# Altium PCB RT-701_V005.PcbDoc (part 1 of 2)
Units mm, origin at the board's own origin, x right, y up, seen from the top; angles counter-clockwise.
Board outline 41.11 x 25.65 mm, 4 copper layers (Top Layer, Signal Layer 1, Signal Layer 2, Bottom Layer), stack 0.777 mm thick; 76 components, 63 nets, 332 pads, 90 vias.
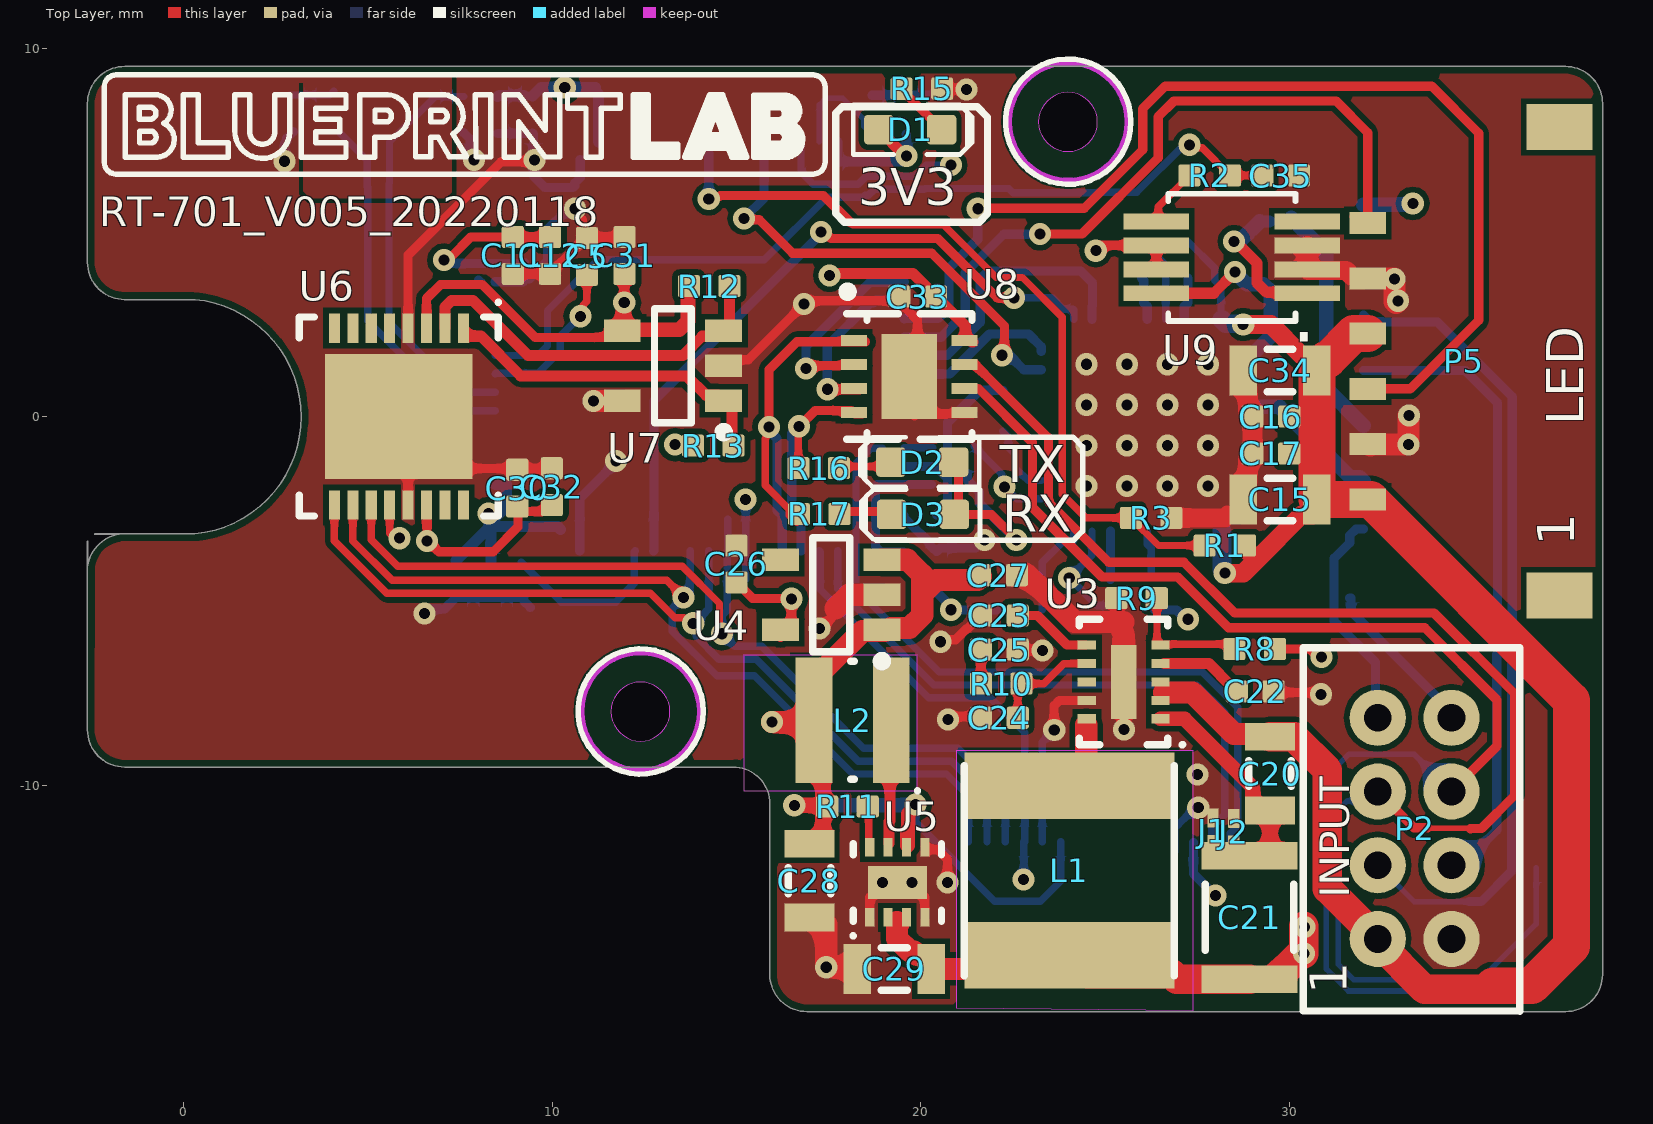
[diagram p0: Top Layer view]
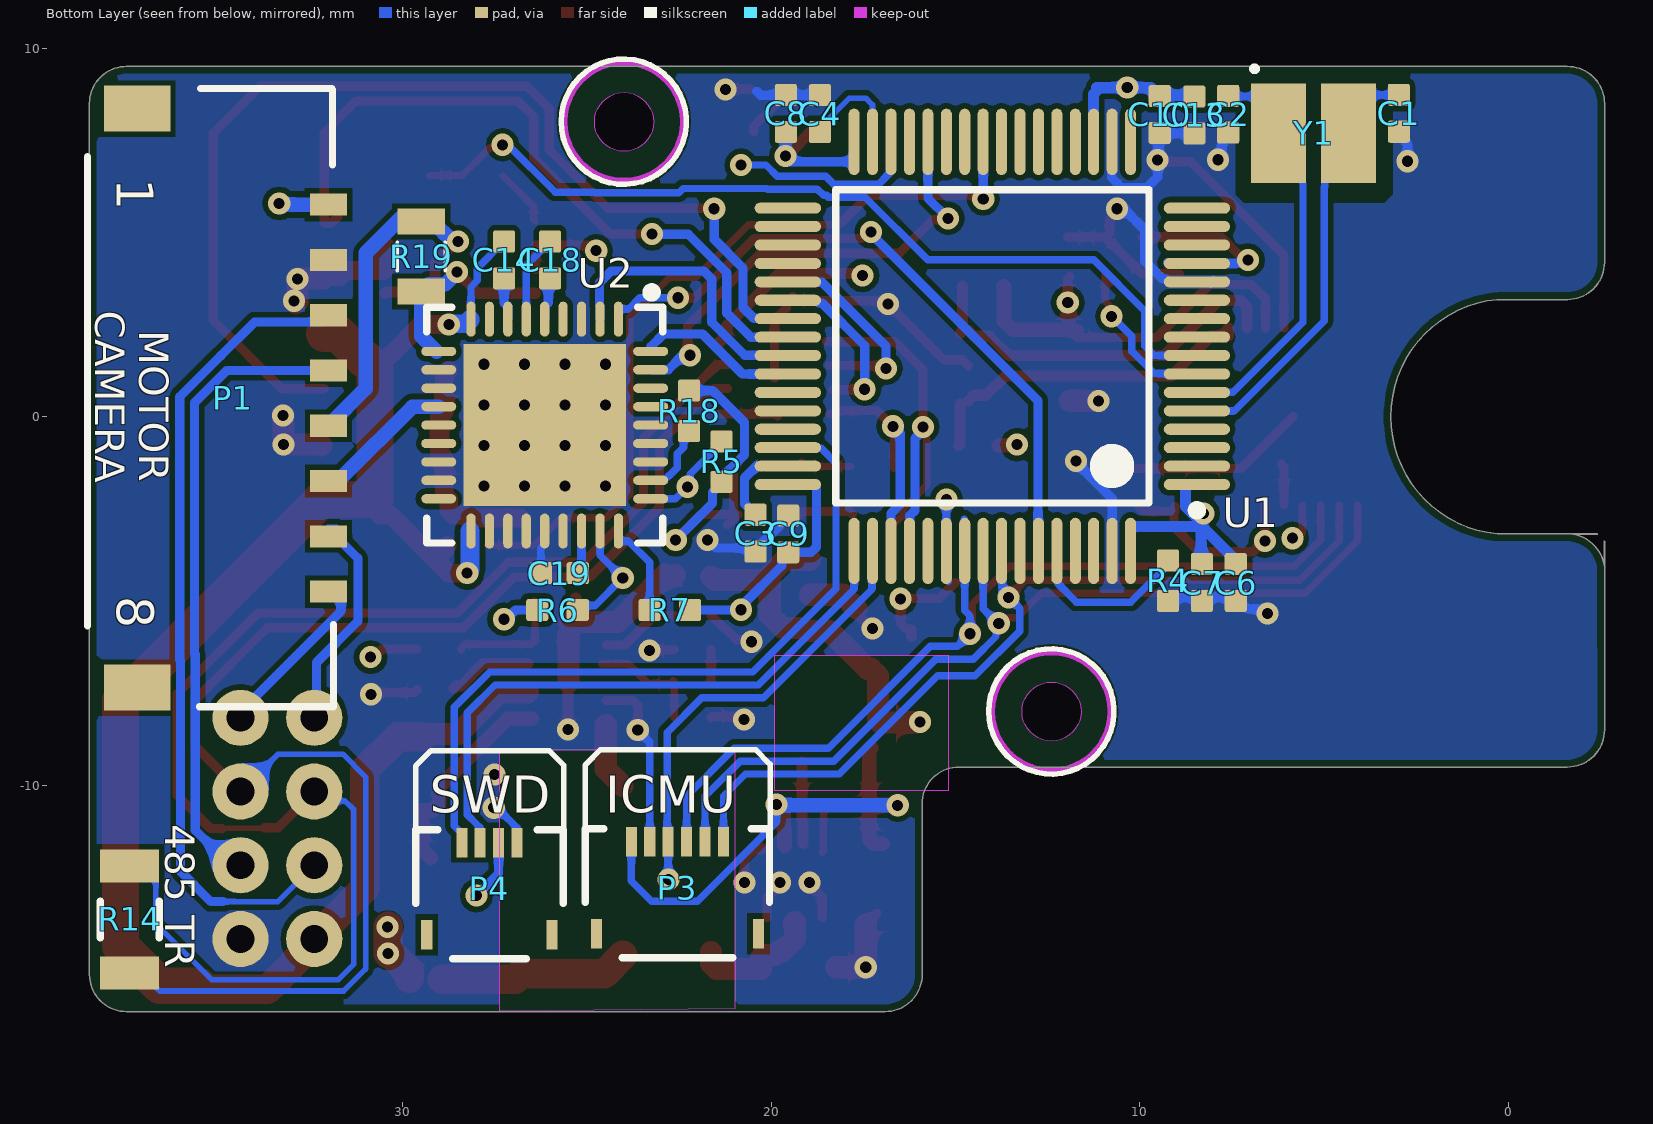
[diagram p1: Bottom Layer view, seen from below]
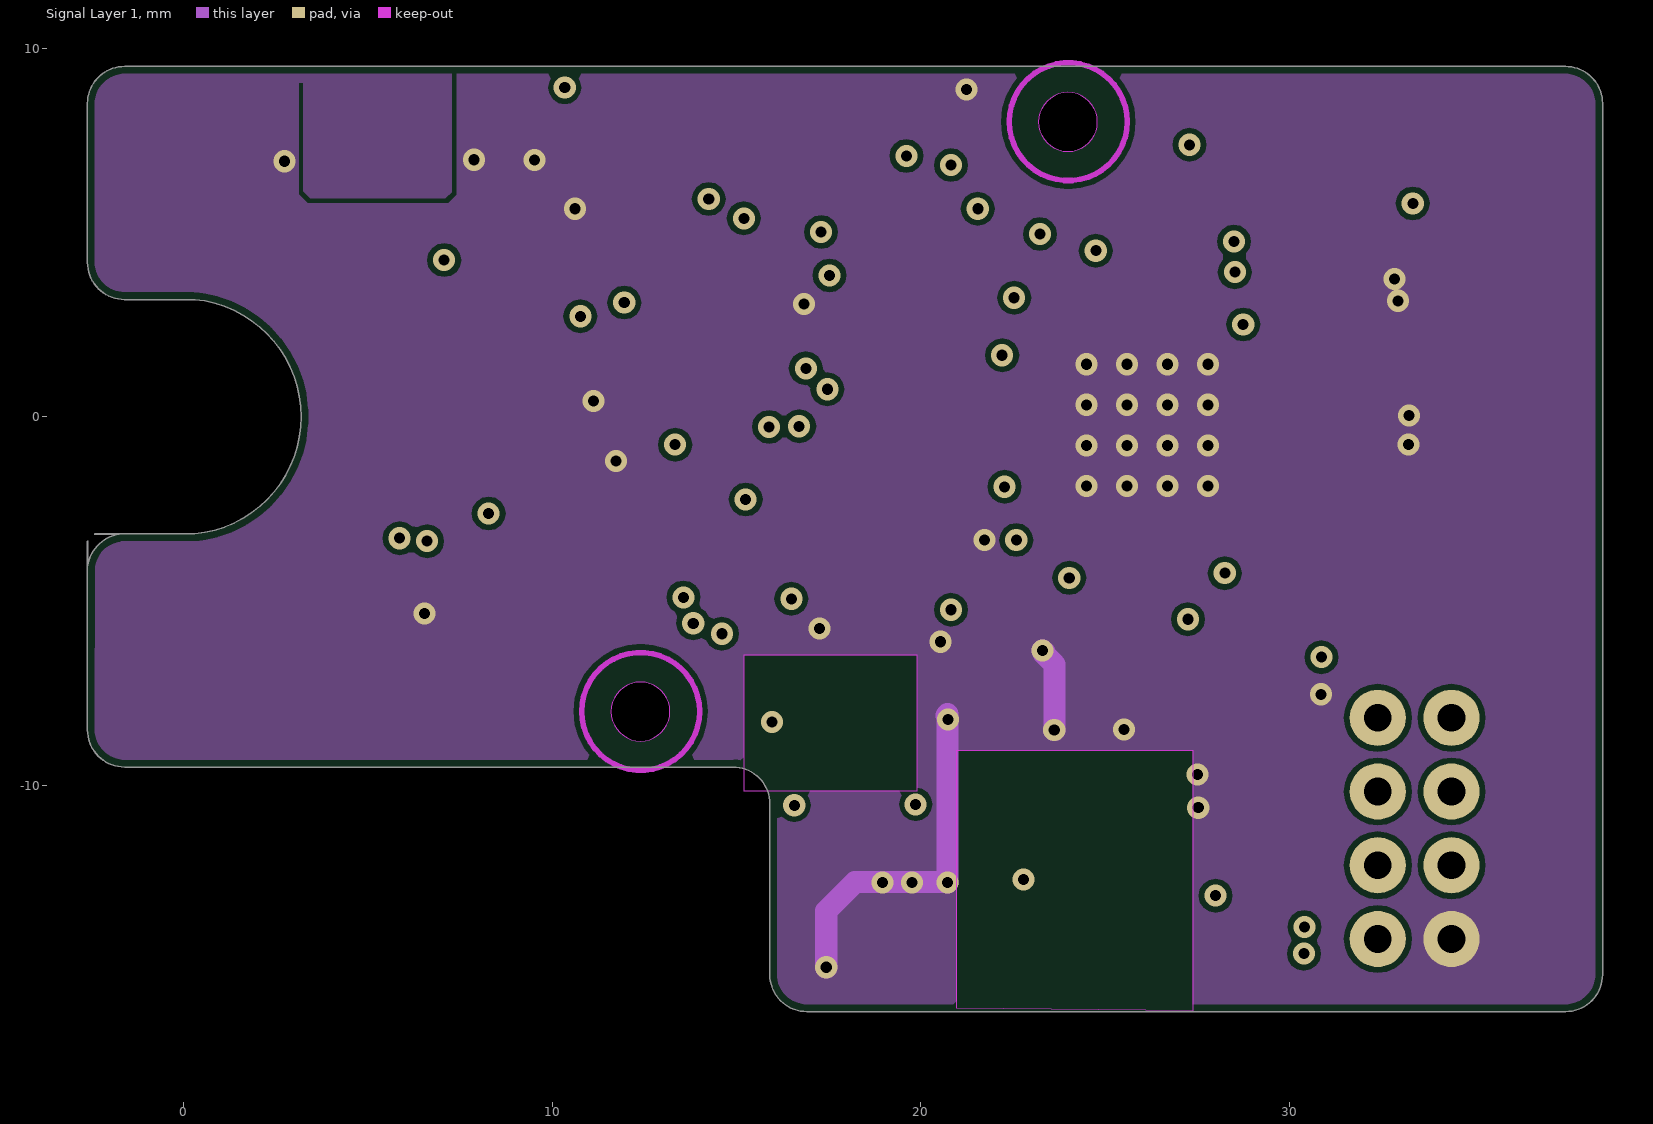
[diagram p2: Signal Layer 1]
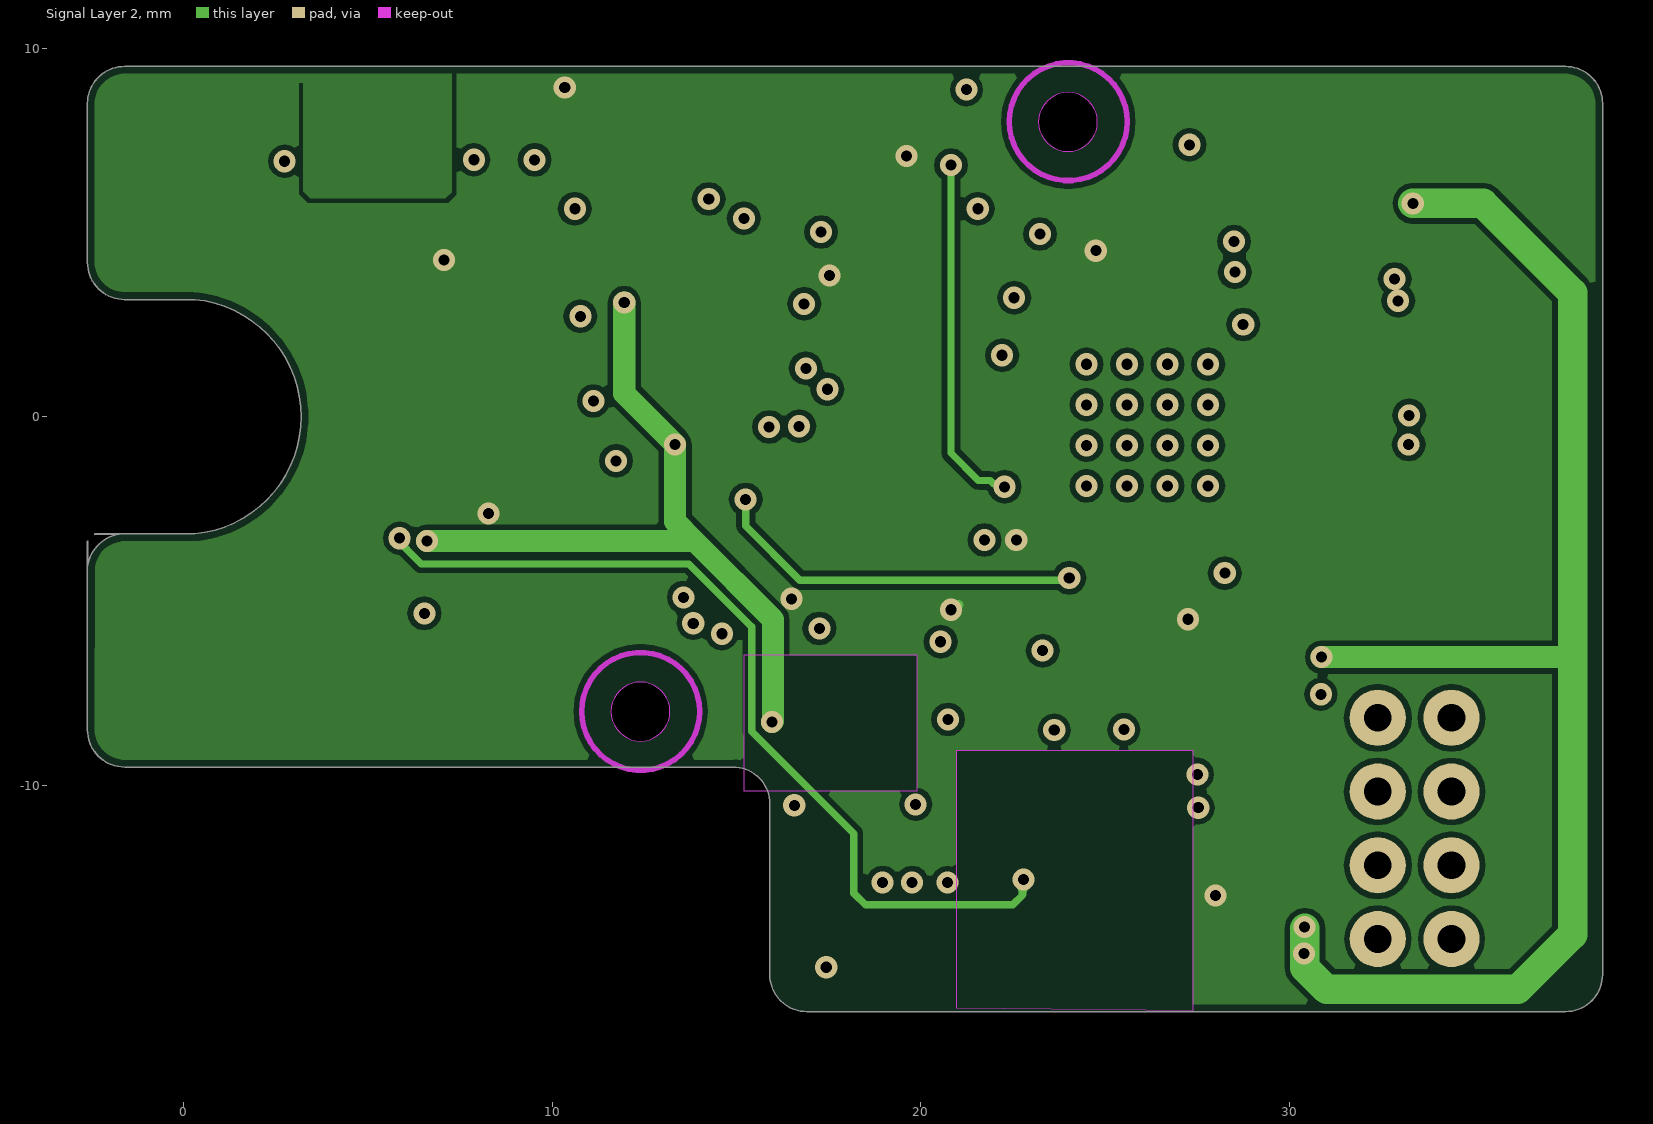
[diagram p3: Signal Layer 2]
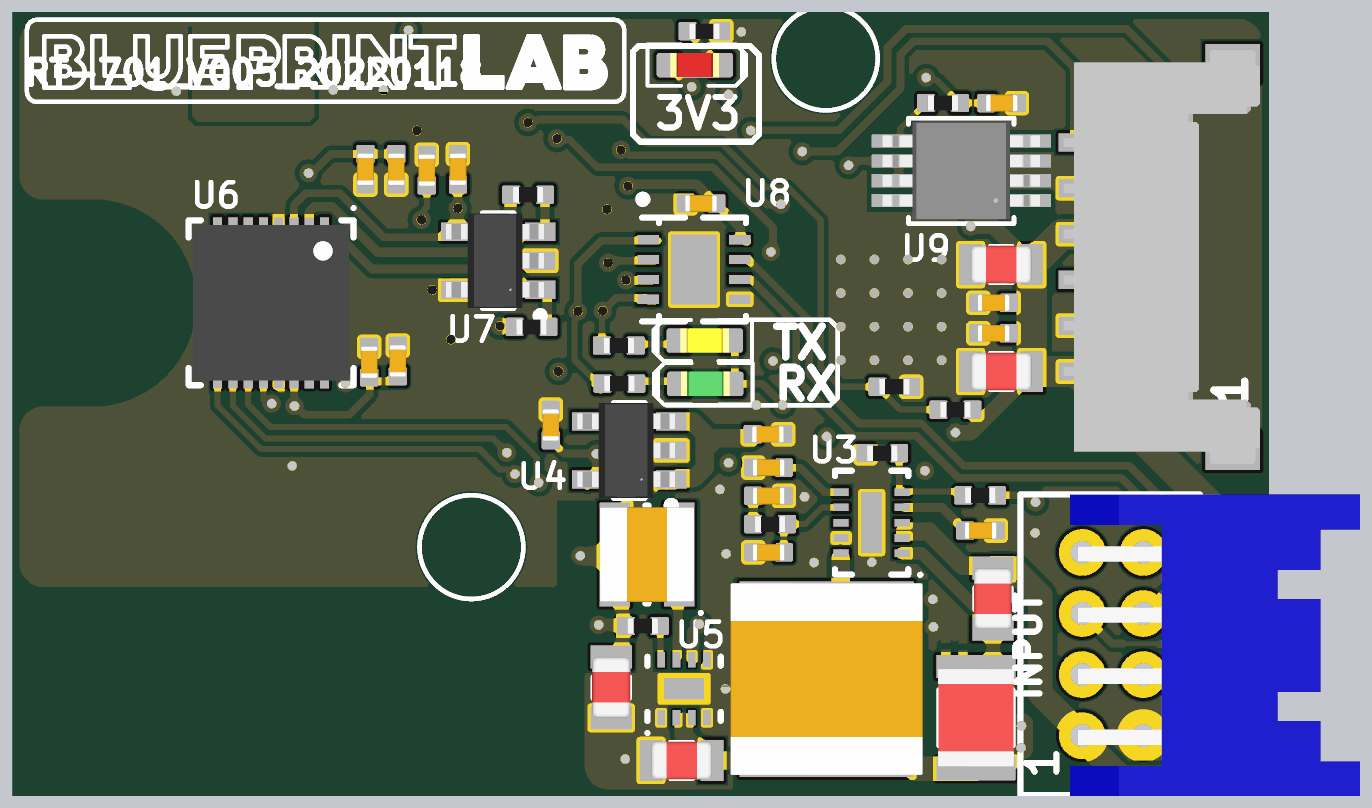
[diagram p5: 3D render of the assembled board from above, using the file's embedded part models]
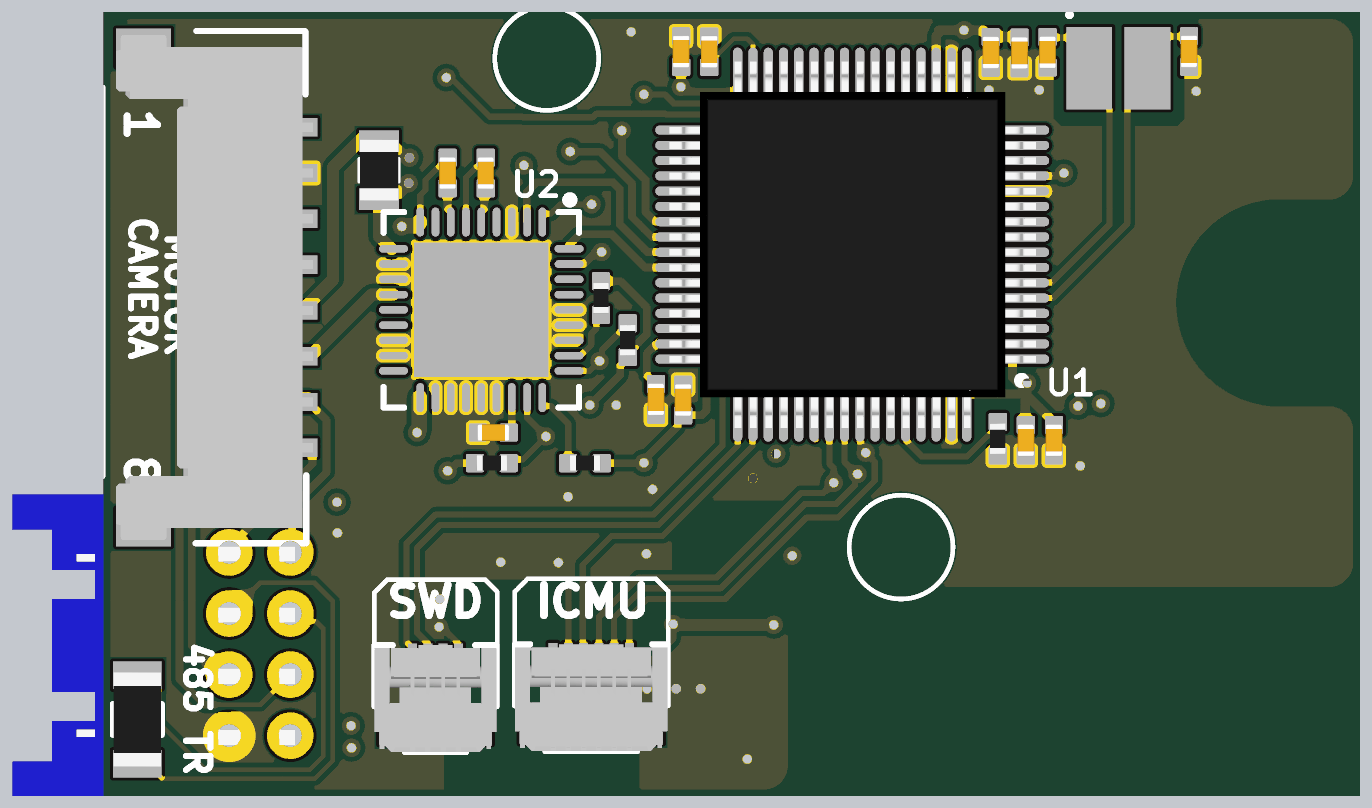
[diagram p6: 3D render of the assembled board from below, using the file's embedded part models]

## Layer stack, top to bottom
Top Solder: solder mask 0.0102, Solder Resist, Dk 3.5
Top Layer: signal copper 0.0356
Dielectric 1: core 0.254, FR-4, Dk 4.2
Signal Layer 1: signal copper 0.0356
Dielectric 3: prepreg 0.127, Dk 4.2
Signal Layer 2: signal copper 0.0356
Dielectric 2: core 0.254, Dk 4.2
Bottom Layer: signal copper 0.0356
Solder Side: solder mask 0.0102, Solder Resist, Dk 3.5

## Board outline
-2.61,-8.505 -2.61,-3.391 cw(c-2.605,-3.391) -2.6,-3.391 -2.6,-4.044 cw(c-1.605,-4.191) -1.751,-3.196 -2.405,-3.196 cw(c-2.405,-3.191) -2.405,-3.186 0.285,-3.186 ccw(c0.285,-2.991) 0.304,-3.185 ccw(c0.285,-2.991) 0.304,-3.185 cw(c0.305,-3.19) 0.304,-3.185 ccw(c-0.005,-0.005) 3.19,-0.005 ccw(c-0.005,-0.005) 0.304,3.175 ccw(c-0.005,-0.005) 0.304,3.175 cw(c0.305,3.18) 0.304,3.175 cw(c0.285,2.981) 0.304,3.175 ccw(c0.305,3.18) 0.304,3.175 ccw(c0.285,2.981) 0.285,3.176 -1.605,3.176 cw(c-1.605,3.181) -1.606,3.176 cw(c-1.605,4.181) -2.61,4.181 -2.61,8.495 cw(c-1.605,8.495) -1.605,9.5 37.495,9.5 cw(c37.495,9.495) 37.495,9.5 cw(c37.495,8.495) 38.5,8.495 cw(c38.495,8.495) 38.5,8.495 38.5,-15.141 ccw(c38.495,-15.141) 38.5,-15.141 cw(c37.495,-15.141) 37.497,-16.146 cw(c37.495,-16.141) 37.495,-16.147 16.909,-16.147 cw(c16.909,-16.141) 16.907,-16.146 cw(c16.909,-15.141) 15.904,-15.143 cw(c15.909,-15.141) 15.903,-15.141 15.904,-10.505 ccw(c14.909,-10.505) 14.909,-9.51 -1.605,-9.51 cw(c-1.605,-9.505) -1.605,-9.51 cw(c-1.605,-8.505)
cut-out: 11.595,-8.005 ccw(c12.395,-8.005) 12.395,-8.805 ccw(c12.395,-8.005) 13.195,-8.005 ccw(c12.395,-8.005) 12.395,-7.205 ccw(c12.395,-8.005)
cut-out: 23.195,7.995 ccw(c23.995,7.995) 23.995,7.195 ccw(c23.995,7.995) 24.795,7.995 ccw(c23.995,7.995) 23.995,8.795 ccw(c23.995,7.995)

## Design rules (kind name [scope] priority, off if disabled: settings)
BoardOutlineClearance [All] p1: gap=0.2 ignorepadtopadclearanceinfootprint=FALSE
Clearance [All] p1: gap=0.15 ignorepadtopadclearanceinfootprint=FALSE
PlaneConnect [All] p1: planeconnectstyle=Direct reliefexpansion=0.508 reliefentries=4 reliefconductorwidth=0.254 reliefairgap=0.254
PolygonConnect [All] p1: connectstyle=Direct reliefconductorwidth=0.254 reliefentries=4 polygonreliefangle="90 Angle" airgapwidth=0.254
RoomDefinition U_VoltReg [InComponentClass('U_VoltReg')] p1: confinementstyle=ConfineIn formatcopy=TRUE lockcomponents=FALSE outline -40.005,-40.005 10.795,-40.005 10.795,-14.605 -40.005,-14.605
RoomDefinition U_RS485 [InComponentClass('U_RS485')] p2: confinementstyle=ConfineIn formatcopy=TRUE lockcomponents=FALSE outline -40.005,-40.005 10.795,-40.005 10.795,-14.605 -40.005,-14.605
RoomDefinition U_MotorDriver [InComponentClass('U_MotorDriver')] p3: confinementstyle=ConfineIn formatcopy=TRUE lockcomponents=FALSE outline -40.005,-40.005 10.795,-40.005 10.795,-14.605 -40.005,-14.605
RoomDefinition U_ICMU150 [InComponentClass('U_ICMU150')] p4: confinementstyle=ConfineIn formatcopy=TRUE lockcomponents=FALSE outline -40.005,-40.005 10.795,-40.005 10.795,-14.605 -40.005,-14.605
RoomDefinition U_Connectors [InComponentClass('U_Connectors')] p5: confinementstyle=ConfineIn formatcopy=TRUE lockcomponents=FALSE outline -40.005,-40.005 10.795,-40.005 10.795,-14.605 -40.005,-14.605
RoomDefinition STM32F405RGT6 [InComponentClass('STM32F405RGT6')] p6: confinementstyle=ConfineIn formatcopy=TRUE lockcomponents=FALSE outline -40.005,-40.005 10.795,-40.005 10.795,-14.605 -40.005,-14.605
RoutingVias [All] p1: holewidth=0.3 width=0.6 viastyle="Through Hole" minholewidth=0.3 minwidth=0.6 maxholewidth=0.7 maxwidth=1.4
SolderMaskExpansion [All] p1: expansion=0.102 istentingtop=FALSE
Width [All] p1: maxlimit=1 minlimit=0.15 preferedwidth=0.25
29 further rules are at their usual default settings.

## Classes and differential pairs
net class U9_Nets: 3V3 AD8418_1 GND M1_OUTA MOTOR1_OUTA NetU9_4
net class R19_Nets: M1_OUTA MOTOR1_OUTA
net class R18_Nets: 3V3 NetR18_2
net class R2_Nets: AD8418_1 AD8418_1_SENSE1
net class C35_Nets: AD8418_1_SENSE1 GND
net class C34_Nets: GND Vm
net class R17_Nets: NetD3_1 TTL_RX1
net class R16_Nets: NetD2_1 TTL_TX1
net class R15_Nets: GND NetD1_1
net class R11_Nets: 5V0 NetR11_2
net class R7_Nets: 3V3 NetR7_2
net class D3_Nets: 3V3 NetD3_1
net class D2_Nets: 3V3 NetD2_1
net class D1_Nets: 3V3 NetD1_1
net class U6_Nets: 5V0 GND ICMU_1_MISO ICMU_1_MOSI ICMU_1_NCS ICMU_1_SCK NetU6_5 NetU6_6 NetU6_7 NetU6_8 NetU6_15 NetU6_16 SCL SDA
net class R14_Nets: RS485_A RS485_B
net class P5_Nets: GND "GPIO4 (LED_PWM_2A)" "GPIO5 (LED_PWM_2B)" VM
component class U_Connectors: P1 P2 P3 P4 P5
net class P4_Nets: 3V3 GND SWDCLK SWDIO
component class U_RS485: C33 D1 D2 D3 R14 R15 R16 R17 U8
component class STM32F405RGT6: C1 C2 C3 C4 C5 C6 C7 C8 C9 C10 C11 C12 C13 R1 R3 R4 U1 Y1
component class U_ICMU150: C30 C31 C32 R12 R13 U6 U7
component class U_MotorDriver: C14 C15 C16 C17 C18 C19 C34 C35 R2 R5 R6 R7 R18 R19 U2 U9
component class U_VoltReg: C20 C21 C22 C23 C24 C25 C26 C27 C28 C29 J1 J2 L1 L2 R8 R9 R10 R11 U3 U4 U5
net class C1_Nets: GND OSC_IN
net class C2_Nets: GND OSC_OUT
net class C3_Nets: GND NetC3_1
net class C4_Nets: GND NetC4_1
net class C5_Nets: GND NRST
net class C6_Nets: 3V3 GND
net class C7_Nets: 3V3 GND
net class C8_Nets: 3V3 GND
net class C9_Nets: 3V3 GND
net class C10_Nets: 3V3 GND
net class C11_Nets: 3V3 GND
net class C12_Nets: 3V3 GND
net class C13_Nets: 3V3 GND
net class C14_Nets: NetC14_2 VM
net class C15_Nets: GND VM
net class C16_Nets: GND VM
net class C17_Nets: GND VM
net class C18_Nets: NetC18_1 NetC18_2
net class C19_Nets: GND NetC19_1
net class C20_Nets: PGND VM
net class C21_Nets: 12V0 PGND
net class C22_Nets: GND VCC
net class C23_Nets: GND SS
net class C24_Nets: COMP GND
net class C25_Nets: GND NetC25_1
net class C26_Nets: 3V3 GND
net class C27_Nets: 5V0 GND
net class C28_Nets: 5V0 GND
net class C29_Nets: 12V0 GND
net class C30_Nets: 5V0 GND
net class C31_Nets: 5V0 GND
net class C32_Nets: 5V0 GND
net class C33_Nets: 3V3 GND
net class J1_Nets: GND PGND
net class J2_Nets: GND PGND
net class L1_Nets: 12V0 LX NetL1_2
net class L2_Nets: 5V0 NetL2_1
net class P2_Nets: GND RS485_A RS485_B RX_+ RX_- TX_+ TX_- VM
net class P1_Nets: 12V0 GND MOTOR1_OUTA MOTOR1_OUTB RX_+ RX_- TX_+ TX_-
net class P3_Nets: 5V0 GND ICMU_1_MISO ICMU_1_MOSI ICMU_1_NCS ICMU_1_SCK
net class R1_Nets: VM VSUP
net class R3_Nets: GND VSUP
net class R4_Nets: BOOT0 GND
net class R5_Nets: 3V3 DRV8313_1_FAULT
net class R6_Nets: 3V3 DRV8313_1_RESET
net class R8_Nets: 12V0 FB/VO
net class R9_Nets: FB/VO GND
net class R10_Nets: COMP NetC25_1
net class R12_Nets: 5V0 SDA
net class R13_Nets: 5V0 SCL
net class U1_Nets: 3V3 AD8418_1_SENSE1 BOOT0 DRV8313_1_EN1 DRV8313_1_EN2 DRV8313_1_FAULT DRV8313_1_IN1 DRV8313_1_IN2 DRV8313_1_RESET GND "GPIO4 (LED_PWM_2A)" "GPIO5 (LED_PWM_2B)" ICMU_1_MISO ICMU_1_MOSI ICMU_1_NCS ICMU_1_SCK NetC3_1 NetC4_1 NetU1_2 NetU1_3 NetU1_4 NetU1_8 NetU1_9 NetU1_10 NetU1_11 NetU1_14 NetU1_15 NetU1_16 NetU1_17 NetU1_20 NetU1_21 NetU1_22 NetU1_23 NetU1_26 NetU1_27 NetU1_28 NetU1_29 NetU1_33 NetU1_34 NetU1_35 NetU1_36 NetU1_44 NetU1_45 NetU1_54 NRST OSC_IN OSC_OUT SPARE SWDCLK SWDIO TTL_RX1 TTL_RXE TTL_TX1 TTL_TXE VSUP
net class U2_Nets: DRV8313_1_EN1 DRV8313_1_EN2 DRV8313_1_FAULT DRV8313_1_IN1 DRV8313_1_IN2 DRV8313_1_RESET GND M1_OUTA MOTOR1_OUTB NetC14_2 NetC18_1 NetC18_2 NetC19_1 NetR7_2 NetR18_2 NetU2_15 NetU2_21 NetU2_22 NetU2_29 VM
net class U3_Nets: COMP FB/VO GND LX PGND RESET SS VCC VM
net class U4_Nets: 3V3 5V0 GND NetU4_4
net class U5_Nets: 5V0 12V0 GND NetL2_1 NetR11_2
net class U7_Nets: 5V0 GND SCL SDA
net class U8_Nets: 3V3 GND RS485_A RS485_B TTL_RX1 TTL_RXE TTL_TX1 TTL_TXE
net class Y1_Nets: OSC_IN OSC_OUT

## Components (designator, comment, footprint, x,y, rotation, side; value= is the part's Value field where it differs from the comment)
C1 "Capacitor" CAP0402 2.971,8.229 r90 bottom
C2 "Capacitor" CAP0402 7.601,8.203 r90 bottom
C3 "Capacitor" CAP0402 20.427,-3.163 r270 bottom value=2.2uF
C4 "Capacitor" CAP0402 18.68,8.221 r90 bottom value=2.2uF
C5 "Capacitor" CAP0402 10.94,4.344 r90 top value=100nF
C6 "Capacitor" CAP0402 7.395,-4.503 r270 bottom value=100nF
C7 "Capacitor" CAP0402 8.313,-4.503 r270 bottom value=100nF
C8 "Capacitor" CAP0402 19.604,8.225 r90 bottom value=100nF
C9 "Capacitor" CAP0402 19.538,-3.185 r90 bottom value=100nF
C10 "Capacitor" CAP0402 9.46,8.196 r270 bottom value=100nF
C11 "Capacitor" CAP0402 8.931,4.372 r270 top value=100nF
C12 "Capacitor" CAP0402 9.94,4.372 r270 top value=1uF
C13 "Capacitor" CAP0402 8.521,8.183 r270 bottom value=4.7uF
C14 "Capacitor" CAP0402 27.25,4.25 r270 bottom value=100nF
C15 "Capacitor" CAP0805 29.75,-2.25 r180 top value=22uF
C16 "Capacitor" CAP0402 29.5,0 r180 top value=100nF
C17 "Capacitor" CAP0402 29.5,-1 r180 top value=100nF
C18 "Capacitor" CAP0402 26,4.25 r90 bottom value=10nF
C19 "Capacitor" CAP0402 25.75,-4.25 r0 bottom value=470nF
C20 "Capacitor" CAP0805 29.477,-9.689 r270 top value=2.2uF
C21 "Capacitor" CAP1210 28.922,-13.59 r90 top value=10uF
C22 "Capacitor" CAP0402 29.075,-7.459 r0 top value=1uF
C23 "Capacitor" CAP0402 22.132,-5.398 r180 top value=6800pF
C24 "Capacitor" CAP0402 22.132,-8.174 r180 top value=12pF
C25 "Capacitor" CAP0402 22.132,-6.323 r0 top value=2200pF
C26 "Capacitor" CAP0402 15,-4 r90 top value=1uF
C27 "Capacitor" CAP0402 22.109,-4.306 r0 top value=1uF
C28 "Capacitor" CAP0805 16.978,-12.595 r270 top value=22uF
C29 "Capacitor" CAP0805 19.282,-14.987 r180 top value=10uF
C30 "Capacitor" CAP0402 9.052,-1.944 r90 top value=100nF
C31 "Capacitor" CAP0402 11.959,4.372 r90 top value=100nF
C32 "Capacitor" CAP0402 9.989,-1.903 r90 top value=100nF
C33 "Capacitor" CAP0402 19.917,3.254 r180 top value=100nF
C34 "Capacitor" CAP0805 29.75,1.25 r180 top value=22uF
C35 "Capacitor" CAP0402 29.766,6.538 r0 top value=1uF
D1 "LED" LED-0603-RED 19.714,7.784 r0 top
D2 "LED" LED-0603-YELLOW 20.041,-1.235 r180 top
D3 "LED" LED-0603-GREEN 20.06,-2.656 r180 top
J1 "2 way net tie junction" 2WAY_LP 27.929,-11.249 r270 top net-tie
J2 "2 way net tie junction" 2WAY_LP 28.495,-11.262 r270 top net-tie
L1 "Inductor" 74404064470 24.031,-12.322 r270 top value=47uH
L2 "Inductor" VLS3012HBX 18.149,-8.244 r180 top value=2.2uH
P1 "Pico-Lock  (OUTPUT MOTOR/CAMERA)" 5040500891 32.004,0.5 r90 bottom
P2 "JST PHD 8 circuit, 2mm pitch (INPUT)" "JST PHD CONNECTOR" 33.401,-11.176 r0 top locked
P3 "Right Angle FFC (ICMU CALLIBRATION)" XF2W_0615_1A 25.047,-14.684 r180 bottom
P4 "Right Angle FFC" XF2W_0415_1A 29.647,-14.712 r180 bottom
P5 "Pico-Lock 6Pin (LED)" 5040500691 32.131,1.5 r270 top locked
R1 "Res" RES0402 28.25,-3.5 r0 top value=200K
R2 "Resistor" RES0402 27.842,6.542 r0 top
R3 "Res" RES0402 26.25,-2.75 r180 top value=22K
R4 "Res" RES0402 9.231,-4.453 r90 bottom value=10K
R5 "Res" RES0402 21.35,-1.225 r90 bottom value=4.7K
R6 "Res" RES0402 25.8,-5.25 r180 bottom value=4.7K
R7 "Res" RES0402 22.75,-5.25 r0 bottom value=4.7K
R8 "Res" RES0402 29.063,-6.307 r0 top value=174k
R9 "Resistor" RES0402 25.855,-4.929 r0 top
R10 "Res" RES0402 22.182,-7.248 r0 top value=20k
R11 "Res" RES0402 18.012,-10.584 r0 top value=100k
R12 "Res" RES0402 14.257,3.539 r180 top value=1K5
R13 "Res" RES0402 14.367,-0.789 r180 top value=1K5
R14 "Res" RES1206 37.411,-13.646 r270 bottom value=120
R15 "Res" RES0402 20.032,8.895 r180 top value=390R
R16 "Res" RES0402 17.228,-1.401 r0 top value=390R
R17 "Res" RES0402 17.245,-2.647 r0 top value=30R
R18 "Res" RES0402 22.229,0.155 r270 bottom value=4.7K
R19 "Resistor" RES0805 29.496,4.343 r90 bottom
U1 "STM32F405RGT6" STM-LQFP64_N 14,1.905 r0 bottom locked
U2 "Motor Driver" DRV8313RHHR 26.147,-0.231 r270 bottom
U3 "12V Regulator" "L10 3X2 0.5MM PITCH" 25.506,-7.201 r180 top locked
U4 "3.3V Regulator" SOT23-5 17.569,-4.837 r180 top
U5 "5V Regulator" DSG8-1600X900TP 19.364,-12.641 r90 top
U6 "Encoder" "IC-MU REVC2" 5.84,0 r270 top locked
U7 "Serial EEPROM" SOT23-5 13.276,1.378 r180 top
U8 "RS485 Tranceiver" MAX22501EATA+ 19.69,1.089 r270 top
U9 "Current Sense" AD8418BRMZ 28.44,4.32 r180 top
Y1 "Osc" "2-SMD-XTAL (3.2X2.5)" 5.286,7.684 r180 bottom value=8MHz

## Footprints (in the part's own frame and the unit in brackets; to place one, negate y for a bottom-side part, rotate by r counter-clockwise, add the part's x,y. Pads: shape width x height; smd on the part's side, far side on the other; paste and mask are expansions set on the pad)
"2-SMD-XTAL (3.2X2.5)" [mm] "DFN, 2-Leads, Body 2.50x3.20mm, Pitch 1.90mm, IPC Medium Density"
  rect 1.5x2.7 smd: 1(-0.95,0) 2(0.95,0)
  silkscreen extent -1.67,1.68 -1.53,1.82, body extent -1.65,-1.3 1.65,1.3, height 1
2WAY_LP [mil] "2 way low power net tie junction"
  rrect5% 20x12 smd paste-100 mask+4: 1(-14,0) 2(14,0)
5040500691 [mm] "6 circuit Pico-Lock connector, 1.5mm pitch"
  rect 0.6x1 smd: 1(3.75,0) 2(2.25,0) 3(0.75,0) 4(-0.75,0) 5(-2.25,0) 6(-3.75,0)
  rect 1.25x1.8 smd: 7(-6.355,5.2) 8(6.355,5.2)
  body extent -6.77,-0.34 6.78,6.1, height 1.98
5040500891 [mm] "8 circuit Pico-Lock connector, 1.5mm pitch"
  rect 0.6x1 smd: 1(5.25,0.01) 2(3.75,0.01) 3(2.25,0.01) 4(0.75,0.01) 5(-0.75,0.01) 6(-2.25,0.01) 7(-3.75,0.01) 8(-5.25,0.01)
  rect 1.25x1.8 smd: 9(-7.855,5.2) 10(7.855,5.2)
  silkscreen extent -8.37,-0.13 8.4,6.55, body extent -8.27,-0.34 8.28,6.1, height 1.98
74404064470 [mm] "Inductor 6x6x4.5"
  rect 1.8x5.7 smd: 1(-2.3,0) 2(2.3,0)
  silkscreen extent -3.46,-2.85 2.85,3.11, body extent -3.15,-3.15 3.15,3.15, height 4.5
AD8418BRMZ [mil]
  rect 70x17 smd paste+0 mask+0: 1(-80.5,38.39) 2(-80.5,12.8) 3(-80.5,-12.8) 4(-80.5,-38.39) 5(80.5,-38.39) 6(80.5,-12.8) 7(80.5,12.8) 8(80.5,38.39)
  silkscreen extent -68,-68 68,68, body extent -101,-63 102,63, height 43
CAP0402 [mm] "Chip Capacitor, 2-Leads, Body 1.00x0.50mm, IPC Medium Density"
  rrect20% 0.6x0.6 smd: 1(-0.5,0) 2(0.5,0)
  body extent -0.53,-0.28 0.53,0.28, height 0.55
CAP0805 [mm] "Chip Capacitor, 2-Leads, Body 2.0x1.2mm, IPC Medium Density"
  rect 0.75x1.35 smd: 1(-1,0) 2(1,0)
  silkscreen extent -0.35,-0.58 0.35,0.58, body extent -1,-0.62 1,0.63, height 0.78
CAP1210 [mm] "Chip Capacitor, 2-Leads, Body 3.2x2.5mm, IPC Medium Density"
  rect 0.75x2.6 smd: 1(-1.675,0) 2(1.675,0)
  silkscreen extent -0.9,-1.2 0.9,1.2, body extent -1.6,-1.25 1.6,1.25, height 0.92
DRV8313RHHR [mm] "QFN, 36-Leads, Body 6.00x6.00mm, Pitch 0.50mm, Thermal Pad 4.40x4.40mm, IPC Medium Density"
  oval 0.95x0.25 smd: 1(-2.875,2) 2(-2.875,1.5) 3(-2.875,1) 4(-2.875,0.5) 5(-2.875,0) 6(-2.875,-0.5) 7(-2.875,-1) 8(-2.875,-1.5) 9(-2.875,-2) 19(2.875,-2) 20(2.875,-1.5) 21(2.875,-1) 22(2.875,-0.5) 23(2.875,0) 24(2.875,0.5) 25(2.875,1) 26(2.875,1.5) 27(2.875,2)
  oval 0.25x0.95 smd: 10(-2,-2.875) 11(-1.5,-2.875) 12(-1,-2.875) 13(-0.5,-2.875) 14(0,-2.875) 15(0.5,-2.875) 16(1,-2.875) 17(1.5,-2.875) 18(2,-2.875) 28(2,2.875) 29(1.5,2.875) 30(1,2.875) 31(0.5,2.875) 32(0,2.875) 33(-0.5,2.875) 34(-1,2.875) 35(-1.5,2.875) 36(-2,2.875)
  rect 4.4x4.4 smd: 37(0,0)
  silkscreen extent -3.72,-3.2 3.2,3.2, body extent -3.05,-3.05 3.05,3.05, height 1
DSG8-1600X900TP [mm] "SON, 8-Leads, Body 2x2mm, Pitch 0.5mm, Thermal Pad 1.6x0.9mm, TI Recommended"
  rect 0.5x0.25 smd paste-0.14 mask+0.07: 1(-0.95,0.75) 2(-0.95,0.25) 3(-0.95,-0.25) 4(-0.95,-0.75) 5(0.95,-0.75) 6(0.95,-0.25) 7(0.95,0.25) 8(0.95,0.75)
  rect 0.9x1.6 smd paste-0.45 mask+0.07: 9(0,0)
  silkscreen extent -1.5,-1.2 1.05,1.25, body extent -1.05,-1.05 1.05,1.05, height 0.8
"IC-MU REVC2" [mm] "SON, 16-Leads, Body 5.0x5.0mm, Pitch 0.50mm, Thermal Pad 4.00x3.40mm, IPC Medium Density"
  rect 0.8x0.3 smd: 1(-2.4,1.75) 2(-2.4,1.25) 3(-2.4,0.75) 4(-2.4,0.25) 5(-2.4,-0.25) 6(-2.4,-0.75) 7(-2.4,-1.25) 8(-2.4,-1.75) 9(2.4,-1.75) 10(2.4,-1.25) 11(2.4,-0.75) 12(2.4,-0.25) 13(2.4,0.25) 14(2.4,0.75) 15(2.4,1.25) 16(2.4,1.75)
  rect 3.4x4 smd paste-1.7: 17(0,0)
  silkscreen extent -3.15,-2.7 2.7,2.75, body extent -2.55,-2.55 2.55,2.55, height 1
"JST PHD CONNECTOR" [mm] "S8B-PHDSS"
  round 1.524 hole 0.75: 1(-1,-3) 2(1,-3) 3(-1,-1) 4(1,-1) 5(-1,1) 6(1,1) 7(-1,3) 8(1,3)
  silkscreen extent -3.03,-4.96 2.85,4.9, body extent -1.4,-5 8.1,4.9, height 5
"L10 3X2 0.5MM PITCH" [mm] "10 LEAD THIN DUAL FLAT NO-LEAD PLASTIC PACKAGE WITH E-PAD (TDFN)"
  rect 0.5x0.25 smd: 1(-1,1) 2(-1,0.5) 3(-1,0) 4(-1,-0.5) 5(-1,-1) 6(1,-1) 7(1,-0.5) 8(1,0) 9(1,0.5) 10(1,1)
  rect 0.69x2 smd: 11(0,0)
  silkscreen extent -1.65,-1.7 1.2,1.75, body extent -1.05,-1.55 1.05,1.55, height 0.8
LED-0603-GREEN [mm]
  round 0.254 on Mech15: 0(0,0)
  rrect25% 0.8x0.8 smd: 1(0.85,0) 2(-0.85,0)
  Top Layer pour cut-out: -0.5,0.5 0.5,0.5 0.5,-0.5 -0.5,-0.5
  silkscreen extent -1.55,-0.67 1.68,0.67, body extent -0.8,-0.4 0.8,0.4, height 0.75
LED-0603-RED [mm]
  round 0.254 on Mech15: 0(0,0)
  rrect25% 0.8x0.8 smd: 1(0.85,0) 2(-0.85,0)
  Top Layer pour cut-out: -0.5,0.5 0.5,0.5 0.5,-0.5 -0.5,-0.5
  silkscreen extent -1.55,-0.67 1.68,0.67, body extent -0.8,-0.4 0.8,0.4, height 0.75
LED-0603-YELLOW [mm]
  round 0.254 on Mech15: 0(0,0)
  rrect25% 0.8x0.8 smd: 1(0.85,0) 2(-0.85,0)
  Top Layer pour cut-out: -0.5,0.5 0.5,0.5 0.5,-0.5 -0.5,-0.5
  silkscreen extent -1.55,-0.67 1.68,0.67, body extent -0.8,-0.4 0.8,0.4, height 0.75
MAX22501EATA+ [mm] "QFN, 8-Leads, Body 3.00x3.00mm, Pitch 0.65mm/0.50mm, Thermal Pad 2.30x1.50mm, IPC Medium Density"
  rect 0.3x0.7 smd: 1(-0.975,-1.5) 2(-0.325,-1.5) 3(0.325,-1.5) 4(0.975,-1.5) 5(0.975,1.5) 6(0.325,1.5) 7(-0.325,1.5) 8(-0.975,1.5)
  rect 2.3x1.5 smd: 9(0,0)
  silkscreen extent -2.42,-1.8 1.7,1.7, body extent -1.55,-1.55 1.55,1.55, height 0.8
RES0402 [mm]
  rrect20% 0.6x0.6 smd: 1(-0.55,0) 2(0.55,0)
  body extent -0.5,-0.25 0.5,0.25, height 0.3
RES0805 [mm]
  rect 0.7x1.3 smd: 1(-0.95,0) 2(0.95,0)
  silkscreen extent -0.38,-0.65 0.38,0.65, body extent -1,-0.63 1,0.62, height 0.5
RES1206 [mm] "Chip Resistor, 2-Leads, Body 3.1x1.6mm, IPC Medium Density"
  rect 0.9x1.6 smd: 1(-1.45,0) 2(1.45,0)
  silkscreen extent -0.5,-0.8 0.5,0.8, body extent -1.55,-0.77 1.55,0.78, height 0.55
SOT23-5 [mm] "SOT23, 5-Leads, Body 2.95x2.80mm, Pitch 0.95mm, IPC Medium Density"
  rect 1x0.6 smd: 1(-1.375,0.95) 2(-1.375,0) 3(-1.375,-0.95) 4(1.375,-0.95) 5(1.375,0.95)
  silkscreen extent -1.5,-1.55 0.5,1.92, body extent -1.5,-1.55 1.7,1.55, height 1.45
STM-LQFP64_N [mm] "Thin QFP, 64-Leads, Body 10x10mm, Pitch 0.5mm, IPC Medium Density"
  oval 1.8x0.3 smd: 1(-5.55,3.75) 2(-5.55,3.25) 3(-5.55,2.75) 4(-5.55,2.25) 5(-5.55,1.75) 6(-5.55,1.25) 7(-5.55,0.75) 8(-5.55,0.25) 9(-5.55,-0.25) 10(-5.55,-0.75) 11(-5.55,-1.25) 12(-5.55,-1.75) 13(-5.55,-2.25) 14(-5.55,-2.75) 15(-5.55,-3.25) 16(-5.55,-3.75) 33(5.55,-3.75) 34(5.55,-3.25) 35(5.55,-2.75) 36(5.55,-2.25) 37(5.55,-1.75) 38(5.55,-1.25) 39(5.55,-0.75) 40(5.55,-0.25) 41(5.55,0.25) 42(5.55,0.75) 43(5.55,1.25) 44(5.55,1.75) 45(5.55,2.25) 46(5.55,2.75) 47(5.55,3.25) 48(5.55,3.75)
  oval 0.3x1.8 smd: 17(-3.75,-5.55) 18(-3.25,-5.55) 19(-2.75,-5.55) 20(-2.25,-5.55) 21(-1.75,-5.55) 22(-1.25,-5.55) 23(-0.75,-5.55) 24(-0.25,-5.55) 25(0.25,-5.55) 26(0.75,-5.55) 27(1.25,-5.55) 28(1.75,-5.55) 29(2.25,-5.55) 30(2.75,-5.55) 31(3.25,-5.55) 32(3.75,-5.55) 49(3.75,5.55) 50(3.25,5.55) 51(2.75,5.55) 52(2.25,5.55) 53(1.75,5.55) 54(1.25,5.55) 55(0.75,5.55) 56(0.25,5.55) 57(-0.25,5.55) 58(-0.75,5.55) 59(-1.25,5.55) 60(-1.75,5.55) 61(-2.25,5.55) 62(-2.75,5.55) 63(-3.25,5.55) 64(-3.75,5.55)
  silkscreen extent -5.67,-4.25 4.25,4.57, body extent -6.01,-6 5.99,6, height 1.48
VLS3012HBX [mm]
  rect 1x3.4 smd: 1(-1.05,0) 2(1.05,0)
  silkscreen extent -1.81,-1.6 0.05,1.96, body extent -1.55,-1.55 1.55,1.55, height 1.2
XF2W_0415_1A [mm] "0.5mm pitch, 4 pin FFC connector, 0.5A"
  rect 0.3x0.8 smd: 1(1.25,3.15) 2(1.75,3.15) 3(2.25,3.15) 4(2.75,3.15) 5(0.3,0.65) 6(3.7,0.65)
  silkscreen extent 0,0 4,3.5, body extent 0,0 4,3.5, height 1.1
XF2W_0615_1A [mm] "0.5mm pitch, 6 pin FFC connector, 0.5A"
  rect 0.3x0.8 smd: 1(1.25,3.15) 2(1.75,3.15) 3(2.25,3.15) 4(2.75,3.15) 5(3.25,3.15) 6(3.75,3.15) 7(0.3,0.65) 8(4.7,0.65)
  silkscreen extent 0,0 5,3.5, body extent 0,0 5,3.5, height 1.1

## Part data
C1 C2: "CAP CER 6PF 100V C0G/NP0 0402", Capacitance=6pF, Case Code (Imperial)=0402, Case Code (Metric)=1005, Manufacturer 1=KEMET, Manufacturer Part Number 1=CBR04C609B1GAC, Max Operating Temperature=125°C, Min Operating Temperature=-55°C, Package Quantity=1, Supplier Part Number 1=399-8610-1-ND, Voltage Rating=100V, Case/Package=0402, Category="Ceramic Capacitors", ComponentLink1Description=https://datasheet.ciiva.com/6257/kem-c1030-cbr-smd-6257478.pdf?src-supplier=Digi-Key, ComponentLink1URL=https://datasheet.ciiva.com/6257/kem-c1030-cbr-smd-6257478.pdf?src-supplier=Digi-Key, ComponentLink2Description=https://datasheet.ciiva.com/6257/kem-c1030-cbr-smd-6257482.pdf?src-supplier=Digi-Key, ComponentLink2URL=https://datasheet.ciiva.com/6257/kem-c1030-cbr-smd-6257482.pdf?src-supplier=Digi-Key, Length=0.039inch, Mount="Surface Mount", Packaging="Tape and Reel", Pricing 1="1=0,34000, 10=0,23300, 50=0,15540, 100=0,13200, 500=0,09320, 1000=0,08154, 2500=0,07766, 5000=0,07184 (USD)", RoHS=Yes, RoHS Compliant=Yes, Series=CBR, Stock 1=20446, Supplier 1=Digi-Key, Thickness=0.022inch, Voltage Rating (DC)=100V, Width=0.02inch
C3 C4: Manufacturer="TDK Corporation", Manufacturer Part Number=C1005X5R0J225K050BC, Supplier Part Number=445-6847-1-ND, Temperature Coefficient=X5R, Tolerance=10%, Voltage=6.3V, Component Type="Capacitor Ceramic", Supplier=Digikey
C5 C6 C7 C8 C9 C10 C11 C14 C16 C17 C33: Manufacturer="TDK Corporation", Manufacturer Part Number=CGA2B3X7R1V104K050BB, Supplier Part Number=445-6901-1-ND, Temperature Coefficient=X7R, Tolerance=10%, Voltage=35V, Component Type="Capacitor Ceramic", Price=0.21, Supplier=Digi-Key
C12 C22 C35: Manufacturer="TDK Corporation", Manufacturer Part Number=C1005X5R1V105K050BC, Supplier Part Number=445-9073-1-ND, Temperature Coefficient=X5R, Tolerance=10%, Voltage=35V, Component Type="Capacitor Ceramic", Supplier=Digikey
C13: Manufacturer="TDK Corporation", Manufacturer Part Number=C1005X5R0J475K050BC, Supplier Part Number=445-5947-1-ND, Tolerance=10%, Voltage=6.3V, Component Type="Capacitor Ceramic", Price=0.6, Supplier=Digikey
C15 C34: Manufacturer="TDK Corporation", Manufacturer Part Number=C2012JB1V226M125AC, Supplier Part Number=445-11527-1-ND, Tolerance=20%, Voltage=35V, Component Type="Capacitor Ceramic", Price=1.49, Supplier=Digikey
C18: Manufacturer="TDK Corporation", Manufacturer Part Number=C1005X7R1V103K050BB, Supplier Part Number=445-7338-1-ND, Temperature Coefficient=X7R, Tolerance=10%, Voltage=35V, Component Type="Capacitor Ceramic", Price=0.14, Supplier=Digi-Key
C19: Manufacturer="Murata Electronics North America", Manufacturer Part Number=GRM155R61A474KE15D, Supplier Part Number=490-3264-1-ND, Temperature Coefficient=X5R, Tolerance=10%, Voltage=10V, Component Type="Capacitor Ceramic", Price=0.140, Supplier=Digi-Key
C20: Manufacturer="TDK Corporation", Manufacturer Part Number=C2012X7R1V225K085AC, Supplier Part Number=445-14547-1-ND, Temperature Coefficient=X7R, Tolerance=10%, Voltage=35V, Component Type="Capacitor Ceramic", Supplier=Digikey
C21: Manufacturer=KEMET, Manufacturer Part Number=C1210C106K9RAC7800, Supplier Part Number=399-13220-1-ND, Temperature Coefficient=X7R, Tolerance=10%, Voltage=6.3V, Component Type="Capacitor Ceramic", Price=1.39, Supplier=Digikey
C23: Manufacturer=KEMET, Manufacturer Part Number=C0402C682J5RACTU, Supplier Part Number=399-8975-1-ND, Temperature Coefficient=X7R, Tolerance=10%, Voltage=50V, Component Type="Capacitor Ceramic", Price=0.13, Supplier=Digi-Key
C24: Manufacturer=KEMET, Manufacturer Part Number=C0402C120J3GACAUTO, Supplier Part Number=399-6829-1-ND, Tolerance=5%, Voltage=25, Component Type="Capacitor Ceramic", Price=0.41, Supplier=digikey
C25: Manufacturer="Murata Electronics North America", Manufacturer Part Number=GRM155R71H222KA01D, Supplier Part Number=490-1305-1-ND, Temperature Coefficient=X7R, Tolerance=10%, Voltage=50V, Component Type="Capacitor Ceramic", Price=0.14, Supplier=Digi-Key
C26 C27: Manufacturer="TDK Corporation", Manufacturer Part Number=C1005X5R1V105K050BC, Supplier Part Number=1276-6795-1-ND, Temperature Coefficient=X5R, Tolerance=10%, Voltage=35V, Component Type="Capacitor Ceramic", Supplier=Digikey
C28: Manufacturer="TDK Corporation", Manufacturer Part Number=C2012X5R0J226K125AB, Supplier Part Number=445-7679-1-ND, Temperature Coefficient=X5R, Tolerance=10%, Voltage=6.3V, Component Type="Ceramic Capacitor", Price=.99, Supplier=Digikey
C29: Manufacturer="Murata Electronics North America", Manufacturer Part Number=GRM21BR61E106MA73L, Supplier Part Number=490-10748-1-ND, Temperature Coefficient=X5R, Tolerance=10%, Voltage=25V, Component Type="Ceramic Capacitor", Price=.29, Supplier=Digikey
C30 C31 C32: Manufacturer="TDK Corporation", Manufacturer Part Number=CGA2B3X7R1V104K050BB, Supplier Part Number=445-6901-1-ND, Voltage=35V, Component Type="Capacitor Ceramic", Supplier=Digi-Key
D1: Colour=Red, Manufacturer="Wurth Electronics Inc.", Manufacturer Part Number=150060RS75000, Supplier Part Number=732-4978-1-ND, Component Type="Red 625nm LED Indication - Discrete 2V 0603 (1608 Metric)", Price=0.39, Supplier=Digi-Key
D2: Colour=Yellow, Manufacturer="Wurth Electronics Inc.", Manufacturer Part Number=150060YS75000, Supplier Part Number=732-4981-1-ND, Component Type="Yellow 590nm LED Indication - Discrete 2V 0603 (1608 Metric)", Price=0.39, Supplier=Digi-Key
D3: Colour=Green, Manufacturer="Wurth Electronics Inc.", Manufacturer Part Number=150060GS75000, Supplier Part Number=732-4971-1-ND, Component Type="Green 520nm LED Indication - Discrete 3.2V 0603 (1608 Metric)", Price=0.39, Supplier=Digi-Key
J1 J2: library part 2way, ComponentLink1Description=Source, ComponentLink1URL=http://www.edatools.cz/addons, FootprintNote="LP=12mil, MP=40mil, HP=120mil"
L1: "FIXED IND 47UH 1.2A 200 MOHM SMD", Manufacturer="Wurth Electronics Inc.", Manufacturer Part Number=74404064470, Supplier Part Number=732-5556-1-ND, Component Type=Inductor, Price=1.63, Supplier=Digi-Key
L2: "FIXED IND 2.2UH 3.15A 106 MOHM", Manufacturer="TDK Corporation", Manufacturer Part Number=VLS3012HBX-2R2M, Supplier Part Number=445-175069-1-ND, Component Type=Inductor, Price=1.49, Supplier=Digikey
P1: library part 5040500891, "Pico-Lock 8 circuit, 1.5mm pitch", Manufacturer="Molex, LLC", Supplier Part Number=WM14421CT-ND, Component Type="8 Positions Header, Shrouded Connector 0.059\" (1.50mm) Surface Mount, Right Angle Gold", Manufacturer Part Number=5040500891, Price=2.37, Supplier=Digi-Key
P2: library part S8B-PHDSS, "JST PHD 8 circuit, 2mm pitch", Manufacturer=JST, Manufacturer Part Number=S8B-PHDSS(LF)(SN), Supplier Part Number=455-2256-ND, Component Type="CONN HEADER PHD SIDE 8POS 2MM", Price=.63, Supplier=Digi-Key
P3: library part XF2W-0615-1A, "6 pin FFC connector,0.5mm pitch, 0.5A", Manufacturer="Omron Electronics Inc-EMC Div", Supplier Part Number=OR1190CT-ND, Component Type="6 Position FPC Connector Contacts, Top and Bottom 0.020\" (0.50mm) Surface Mount, Right Angle", Manufacturer Part Number=XF2W-0615-1A, Price=1.41, Supplier=Digi-Key
P4: library part XF2W-0415-1A, "4 pin FFC connector,0.5mm pitch, 0.5A", Manufacturer="Omron Electronics Inc-EMC Div", Supplier Part Number=OR1148CT-ND, Component Type="4 Position FPC Connector Contacts, Top and Bottom 0.020\" (0.50mm) Surface Mount, Right Angle", Manufacturer Part Number=XF2W-0415-1A, Supplier=Digi-Key
P5: library part 5040500691, "Pico-Lock 5 circuit, 1.5mm pitch", Manufacturer="Molex, LLC", Supplier Part Number=WM10143CT-ND, Component Type="6 Positions Header, Shrouded Connector 0.059\" (1.50mm) Surface Mount, Right Angle Gold", Manufacturer Part Number=5040500691, Price=2.06, Supplier=Digi-Key
R1: library part Resistor, "Resistor", Manufacturer=Yageo, Manufacturer Part Number=RC0402FR-07200KL, Power Rating=0.063W, Supplier Part Number=311-200KLRCT-ND, Tolerance=1%, Component Type=Resistor, Price=0.14, Supplier=Digi-Key
R2: Case Code (Imperial)=0402, Case Code (Metric)=1005, Manufacturer 1=Panasonic, Manufacturer Part Number 1=ERJ-2RKF10R0X, Max Operating Temperature=155°C, Max Power Dissipation=100mW, Min Operating Temperature=-55°C, Package Quantity=1, Resistance=10R, Supplier Part Number 1=P10.0LCT-ND, Temperature Coefficient=100ppm/°C, Tolerance=1%, Voltage Rating=50V, Case/Package=0402, ComponentLink1Description=https://datasheet.ciiva.com/11821/0900766b80f80784-11821168.pdf?src-supplier=RSComponents, ComponentLink1URL=https://datasheet.ciiva.com/11821/0900766b80f80784-11821168.pdf?src-supplier=RSComponents, ComponentLink2Description=https://datasheet.ciiva.com/7802/aoa0000ce2-7802405.pdf?src-supplier=Element14, ComponentLink2URL=https://datasheet.ciiva.com/7802/aoa0000ce2-7802405.pdf?src-supplier=Element14, ComponentLink3Description=https://datasheet.ciiva.com/43467/1678782-43467127.pdf?src-supplier=Farnell, ComponentLink3URL=https://datasheet.ciiva.com/43467/1678782-43467127.pdf?src-supplier=Farnell, ComponentLink4Description=https://datasheet.ciiva.com/22668/1678782-22668302.pdf?src-supplier=Element14, ComponentLink4URL=https://datasheet.ciiva.com/22668/1678782-22668302.pdf?src-supplier=Element14, ComponentLink5Description=https://datasheet.ciiva.com/16773/70260748-16773366.pdf?src-supplier=Allied+Electronics, ComponentLink5URL=https://datasheet.ciiva.com/16773/70260748-16773366.pdf?src-supplier=Allied+Electronics, ComponentLink6Description=https://datasheet.ciiva.com/9194/aoa0000ce2-9194120.pdf?src-supplier=Avnet, ComponentLink6URL=https://datasheet.ciiva.com/9194/aoa0000ce2-9194120.pdf?src-supplier=Avnet, ComponentLink7Description=https://datasheet.ciiva.com/30218/aoa0000ce2-30218536.pdf?src-supplier=Onlinecomponents.com, ComponentLink7URL=https://datasheet.ciiva.com/30218/aoa0000ce2-30218536.pdf?src-supplier=Onlinecomponents.com, ComponentLink8Description=https://datasheet.ciiva.com/17212/aoa0000ce2-17212057.pdf?src-supplier=Avnet+Europe, ComponentLink8URL=https://datasheet.ciiva.com/17212/aoa0000ce2-17212057.pdf?src-supplier=Avnet+Europe, ComponentLink9Description=https://datasheet.ciiva.com/24071/aoa0000ce2-24071514.pdf?src-supplier=Mouser, ComponentLink9URL=https://datasheet.ciiva.com/24071/aoa0000ce2-24071514.pdf?src-supplier=Mouser, ComponentLink10Description=https://datasheet.ciiva.com/27055/1987054-27055644.pdf?src-supplier=Jameco, ComponentLink10URL=https://datasheet.ciiva.com/27055/1987054-27055644.pdf?src-supplier=Jameco, ComponentLink11Description=https://datasheet.ciiva.com/6082/aoa0000ce2-6082046.pdf?src-supplier=Farnell, ComponentLink11URL=https://datasheet.ciiva.com/6082/aoa0000ce2-6082046.pdf?src-supplier=Farnell, Composition="Thick Film", Contact Plating=Tin, Depth=0.5mm, Features="Automotive AEC-Q200", Height=0.35mm, Lead Free="Lead Free", Length=1mm, Military Standard=Not, Mount="Surface Mount", Number of Pins=2, Number of Terminations=2, Packaging="Tape and Reel", Power Rating=100mW, Pricing 1="1=0,10000, 10=0,04800, 100=0,01960, 1000=0,00882, 2500=0,00766, 5000=0,00633 (USD)", Radiation Hardening=No, REACH SVHC="No SVHC", RoHS=Yes, Stock 1=6121248, Supplier 1=Digi-Key, Termination=SMD/SMT, Voltage Rating (DC)=50V, Width=0.5mm
R3: library part Resistor, "Resistor", Manufacturer=Yageo, Manufacturer Part Number=RC0402FR-0722KL, Power Rating=0.063W, Supplier Part Number=311-22.0KLRCT-ND, Tolerance=1%, Component Type=Resistor, Price=0.14, Supplier=Digikey
R4: library part Resistor, "Resistor", Manufacturer=Yageo, Manufacturer Part Number=RC0402FR-0710KL, Power Rating=0.063W, Supplier Part Number=311-10.0KLRCT-ND, Tolerance=1%, Component Type=Resistor, Price=0.14, Supplier=Digi-Key
R5 R6 R7 R18: library part Resistor, "Resistor", Manufacturer=Yageo, Manufacturer Part Number=RC0402JR-074K7L, Power Rating=0.063W, Supplier Part Number=311-4.7KJRCT-ND, Tolerance=5%, Component Type=Resistor, Price=0.14, Supplier=Digikey
R8: library part Resistor, "Resistor", Manufacturer=Yageo, Manufacturer Part Number=RC0402FR-07174KL, Power Rating=0.063W, Supplier Part Number=YAG3008CT-ND, Tolerance=1%, Component Type=Resistor, Price=.14, Supplier=Digikey
R9: "RES SMD 14K OHM 1% 1/16W 0402", Case Code (Imperial)=0402, Case Code (Metric)=1005, Manufacturer 1=Yageo, Manufacturer Part Number 1=RC0402FR-0714KL, Max Operating Temperature=155°C, Max Power Dissipation=63mW, Min Operating Temperature=-55°C, Package Quantity=1, Power Rating=62.5mW, Resistance=14kR, Resistor Type="Thick Film", Supplier Part Number 1=311-14.0KLRCT-ND, Temperature Coefficient=100ppm/°C, Tolerance=1%, Voltage Rating=50V, Case/Package=0402, Category="Chip SMD Resistors", ComponentLink1Description=https://datasheet.ciiva.com/2453/pyu-r-int-thick-7-2453600.pdf?src-supplier=Digi-Key, ComponentLink1URL=https://datasheet.ciiva.com/2453/pyu-r-int-thick-7-2453600.pdf?src-supplier=Digi-Key, ComponentLink2Description=https://datasheet.ciiva.com/16869/pyu-rc0402-51-rohs-l-6-16869077.pdf?src-supplier=Avnet+Europe, ComponentLink2URL=https://datasheet.ciiva.com/16869/pyu-rc0402-51-rohs-l-6-16869077.pdf?src-supplier=Avnet+Europe, ComponentLink3Description=https://datasheet.ciiva.com/28404/pyu-rc0402-51-rohs-l-6-28404357.pdf?src-supplier=Avnet+Europe, ComponentLink3URL=https://datasheet.ciiva.com/28404/pyu-rc0402-51-rohs-l-6-28404357.pdf?src-supplier=Avnet+Europe, ComponentLink4Description=https://datasheet.ciiva.com/8890/pyu-rc0402-51-rohs-l-6-8890872.pdf?src-supplier=Avnet, ComponentLink4URL=https://datasheet.ciiva.com/8890/pyu-rc0402-51-rohs-l-6-8890872.pdf?src-supplier=Avnet, ComponentLink5Description=https://datasheet.ciiva.com/2453/pyu-r-int-thick-7-2453598.pdf?src-supplier=Digi-Key, ComponentLink5URL=https://datasheet.ciiva.com/2453/pyu-r-int-thick-7-2453598.pdf?src-supplier=Digi-Key, ComponentLink6Description=https://datasheet.ciiva.com/2453/pyu-r-int-thick-7-2453599.pdf?src-supplier=Digi-Key, ComponentLink6URL=https://datasheet.ciiva.com/2453/pyu-r-int-thick-7-2453599.pdf?src-supplier=Digi-Key, Construction=Rectangular, Contact Plating=Tin,Matte, Depth=0.5mm, Features="Moisture Resistant", Height=0.016inch, Lead Free="Lead Free", Length=1mm, Military Standard=Not, Number of Terminations=2, Packaging="Tape and Reel", Pricing 1="1=0,10000, 10=0,01600, 100=0,00640, 1000=0,00286, 2500=0,00248, 5000=0,00205 (USD)", RoHS=Yes, RoHS Compliant=Yes, Series=RC, Stock 1=350826, Supplier 1=Digi-Key, Technology="THICK FILM", Termination=SMD/SMT, Voltage Rating (DC)=50V, Width=0.02inch, Working Voltage=50V
R10: library part Resistor, "Resistor", Manufacturer=Yageo, Manufacturer Part Number=RT0402DRD0720KL, Power Rating=0.063, Supplier Part Number=311-2157-1-ND, Tolerance=±0.5%, Component Type=Resistor, Price=.14, Supplier=Digikey
R11: library part Resistor, "Resistor", Manufacturer=Yageo, Manufacturer Part Number=RC0402FR-07100KL, Power Rating=0.063, Supplier Part Number=311-100KLRCT-ND, Tolerance=1%, Component Type=Resistor, Price=.15, Supplier=Digikey
R12 R13: library part Resistor, "Resistor", Manufacturer=Yageo, Manufacturer Part Number=RC0402FR-071K5L, Supplier Part Number=311-1.50KLRCT-ND, Component Type=Resistor, Supplier=Digi-Key
R14: library part Resistor, "Resistor", Component Type=Resistor
R15 R16: library part Resistor, "Resistor", Manufacturer=Yageo, Manufacturer Part Number=RC0402FR-07390RL, Power Rating=0.063W, Supplier Part Number=311-390LRCT-ND, Tolerance=1%, Component Type=Resistor, Price=0.14, Supplier=Digi-Key
R17: library part Resistor, "Resistor", Manufacturer=Yageo, Manufacturer Part Number=RC0402FR-0730RL, Power Rating=0.063W, Supplier Part Number=311-30LRCT-ND, Tolerance=1%, Component Type=Resistor, Price=0.14, Supplier=Digi-Key
R19: Case Code (Imperial)=0805, Case Code (Metric)=2012, Manufacturer 1=Bourns, Manufacturer Part Number 1=CRM0805-FW-R050ELF, Max Operating Temperature=155°C, Max Power Dissipation=250mW, Min Operating Temperature=-55°C, Package Quantity=1, Resistance=50mR, Supplier Part Number 1=CRM0805-FW-R050ELFCT-ND, Temperature Coefficient=200ppm/°C, Tolerance=1%, Voltage Rating=477mV, Case/Package=0805, ComponentLink1Description=https://datasheet.ciiva.com/22693/1859481-22693285.pdf?src-supplier=Element14, ComponentLink1URL=https://datasheet.ciiva.com/22693/1859481-22693285.pdf?src-supplier=Element14, ComponentLink2Description=https://datasheet.ciiva.com/6564/crm0805-1206-2010-6564006.pdf?src-supplier=Digi-Key, ComponentLink2URL=https://datasheet.ciiva.com/6564/crm0805-1206-2010-6564006.pdf?src-supplier=Digi-Key, ComponentLink3Description=https://datasheet.ciiva.com/6564/crm0805-1206-2010-6564007.pdf?src-supplier=Digi-Key, ComponentLink3URL=https://datasheet.ciiva.com/6564/crm0805-1206-2010-6564007.pdf?src-supplier=Digi-Key, ComponentLink4Description=https://datasheet.ciiva.com/6564/crm0805-1206-2010-6564008.pdf?src-supplier=Digi-Key, ComponentLink4URL=https://datasheet.ciiva.com/6564/crm0805-1206-2010-6564008.pdf?src-supplier=Digi-Key, ComponentLink5Description=https://datasheet.ciiva.com/7985/1859481-7985934.pdf?src-supplier=Element14, ComponentLink5URL=https://datasheet.ciiva.com/7985/1859481-7985934.pdf?src-supplier=Element14, Composition="Thick Film", Height=0.024inch, Length=0.079inch, Number of Pins=2, Number of Terminations=2, Packaging="Tape and Reel", Power Rating=250mW, Pricing 1="1=0,65000, 10=0,48200, 25=0,39120, 50=0,34020, 100=0,28070, 250=0,24384, 500=0,19846, 1000=0,15741 (USD)", REACH SVHC="No SVHC", RoHS=Yes, Stock 1=43412, Supplier 1=Digi-Key, Width=0.047inch
U1: "ARM Cortex-M4 32-bit MCU+FPU, 210 DMIPS, 1024 kB Flash, 192 kB Internal RAM, 51 I/Os, 64-pin LQFP, -40 to 85 degC, Tray", Manufacturer=STMicroelectronics, Supplier Part Number=497-11767-ND, Component Type="ARM® Cortex®-M4 STM32 F4 Microcontroller IC 32-Bit 168MHz 1MB (1M x 8) FLASH 64-LQFP (10x10)", Manufacturer Part Number=STM32F405RGT6, Price=14.74, Supplier=Digi-Key
U2: library part DRV8313RHHR, "2.5A 3-phase BLDC controller", Manufacturer="Texas Instruments", Supplier Part Number=296-44591-1-ND, Component Type="Motor Driver Power MOSFET", Manufacturer Part Number=DRV8313RHHR, Price=5.08, Supplier=Digi-Key
U3: library part MAX17502G, "60V, 1A, Ultra-Small, High-Efficiency,  Synchronous Step-Down DC-DC Converter", Manufacturer="Maxim Integrated", Manufacturer Part Number=MAX17502GATB+T, Supplier Part Number=MAX17502GATB+TCT-ND, Component Type="Synchronous Step-Down DC-DC Converter", Supplier=Digi-Key, Supplier 1=Digi-Key, Supplier Part Number 1=MAX17502GATB+TCT-ND
U4: library part MIC5501_SOT23-5, "MIC5504_SOT23-5", Manufacturer="Microchip Technology", Manufacturer Part Number=MIC5504-3.3YM5-TR, Supplier Part Number=576-4764-1-ND, Component Type="IC REG LINEAR 3.3V 300MA SOT23-5", Price=0.16, Supplier=Digi-Key
U5: library part TPS62163DSGR, "Buck Step Down Regulator with 3 to 17 V Input and 5 V Output, -40 to 85 degC, 8-Pin WSON (DSG), Green (RoHS & no Sb/Br)", Manufacturer="Texas Instruments", Rating=Catalog, Supplier Part Number=296-29898-1-ND, Supplier Part Number 1=296-29898-2-ND, Switch Current Limit(Typ)(A)=1.8, Code_JEDEC=MO-229, Component Type="Buck Step Down Regulator", ComponentLink1Description=Datasheet, ComponentLink1URL=http://www.ti.com/general/docs/lit/getliterature.tsp?genericPartNumber=TPS62163&fileType=pdf, ComponentLink2Description="Package Specification", ComponentLink2URL=http://www.ti.com/litv/pdf/mpds308a, ComponentLink3Description="URL Link1", ComponentLink3URL="Samples URL:http://www.ti.com/product/tps62163#samples", DatasheetVersion=SLVSAM2A, Duty Cycle(Max)(%)=100, Eco-Plan="Green (RoHS & no Sb/Br)", Iout(Max)(A)=1, Iq(Typ)(mA)=0.017, Manufacturer Part Number=TPS62163DSGR, Mounting Technology="Surface Mount", PackageDescription="8-Pin Plastic Small Outline No-Lead, 2 x 2 x 0.8 mm Body, 0.5 mm Pitch, Exposed Pad", PackageReference=DSG8-1600X900TP, PackageVersion="revB, Oct-2010", PartNumber=TPS62163DSGR, Preset Vout(V)=5, Regulated Outputs(#)=1, SubFamily="Step-Down Regulator", Supplier=Digi-Key, Supplier 1=Digi-Key, Supplier 2=Digi-Key, Supplier 3=Digi-Key, Supplier 4=Newark, Supplier 5=Mouser, Supplier Part Number 2=296-29898-1-ND, Supplier Part Number 3=296-29898-6-ND, Supplier Part Number 4=74T5559, Supplier Part Number 5=595-TPS62163DSGR, Synchronous Rectification=TRUE, Topology=Buck, Vin(Max)(V)=17, Vin(Min)(V)=3, Vout(Max)(V)=5, Vout(Min)(V)=5
U6: library part "IC-MU DFN16-5x5", "Off Axis Encoder with Hall Sensors", Manufacturer=iC-Haus, Manufacturer Part Number=IC-MU150DFN16-5X5, Component Type="Magnetic Off-Axis Absolute Position Encoder - pole width 1.50 mm", Supplier="Symmetry Electronics", Supplier Part Number=IC-MU150DFN16-5X5
U7: library part 24AA02T-I/OT, "2K I2C Serial EEPROM", Manufacturer="Microchip Technology", Supplier Part Number=24AA02T-I/OTCT-ND, Component Type="IC EEPROM 2KBIT 400KHZ SOT23-5", Manufacturer Part Number=24AA02T-I/OT, Price=0.28, Supplier=Digi-Key
U8: library part MAX22501EATA+, Manufacturer="Maxim Integrated", Supplier Part Number=MAX22501EATA+-ND, Component Type="1/1 Transceiver Half RS422, RS485 8-TDFN (3x3)", Manufacturer Part Number=MAX22501EATA+, Price=2.91, Supplier=Digi-Key
U9: library part AD8418BRMZ, "Imported", Manufacturer="Analog Devices Inc", Supplier Part Number=AD8418BRMZ-ND, Component Type="Current Sense Amplifier 1 Circuit 8-MSOP", Manufacturer Part Number=AD8418BRMZ, Price=3.50, Supplier=Digi-Key
Y1: library part "Crystal Oscillator", "Crystal Oscillator", Manufacturer=NDK, Manufacturer Part Number=NX3225GD-8MHZ-STD-CRA-3, Supplier Part Number=644-1178-1-ND, Component Type="Crystal Oscillator", Price=0.94, Supplier=Digi-Key

## Via types
v1: diameter 0.6, hole 0.3, Top Layer to Bottom Layer, tented both sides, 90 vias

## Nets (pads, with @x,y where several pads share a name; then routed paths per layer and width w, separated by ;. In a path a pad name is that pad's centre, name@x,y a point inside that pad or via, vN(x,y) a via of type N, cw(c..) or ccw(c..) an arc to the next point about the centre after c; other vN are vias at no path point)
3V3: C6.1 C7.1 C8.1 C9.1 C10.1 C11.1 C12.1 C13.1 C26.1 C33.1 D1.2 D2.2 D3.2 P4.3 R5.1 R6.1 R7.1 R18.1 U1.1 U1.13 U1.19 U1.32 U1.48 U1.64 U4.5 U8.8 U9.6 U9.7 | length 50.8
  Top Layer w0.25: v1(7.066,4.246) v1@7.066,4.341 ; v1@7.153,4.235 7.153,4.238 7.228,4.313 7.231,4.313 7.79,4.872 C11.1@8.931,4.872 C12.1@9.94,4.872 ; C26.1@15,-4.5 15.437,-4.937 16.482,-4.937 v1(16.49,-4.945) ; U4.5@16.221,-5.764 16.337,-5.764 16.49,-5.612 v1@16.49,-4.937 ; D2.2@20.891,-1.235 21.027,-1.371 D3.2@21.027,-2.626 ; D3.2@21.185,-2.931 D3.2@20.91,-2.656 21.916,-2.656 22.592,-3.333 v1(22.592,-3.351) ; v1(24.75,4.5) 24.845,4.5 24.99,4.645 U9.6@26.395,4.645 U9.7@26.395,3.995
  Top Layer w0.3: U4.5@16.194,-5.973 U4.5@16.194,-5.787 ; v1(17.525,3.829) 17.58,3.884 19.787,3.884 21.212,2.459 21.212,2.193 21.388,2.018 U8.8@21.412,2.018 ; D1.2@18.864,7.784 19.578,7.071 v1(19.611,7.071)
  Signal Layer 2 w0.25: v1@20.852,-5.28 v1@21.028,-5.104
  Bottom Layer w0.25: v1(7.066,4.246) 7.018,4.246 6.927,4.155 U1.13@8.45,4.155 9.214,4.155 U1.13@9.239,4.181 ; U1.32@17.75,7.455 17.75,6.939 17.773,6.916 19.362,6.916 19.517,7.071 v1(19.611,7.071) 19.611,7.656 C8.1@19.609,7.658 ; C9.1@19.538,-3.803 19.657,-3.803 19.713,-3.86 19.713,-4.049 20.82,-5.156 v1(20.82,-5.242) 20.828,-5.25 R7.1@22.2,-5.25 ; C9.1@19.538,-3.685 18.919,-3.685 18.773,-3.538 18.773,-1.886 18.814,-1.845 U1.48@19.55,-1.845 U1.48@20.284,-1.845 ; R18.1@22.229,0.705 21.593,0.705 20.725,-0.163 20.725,-0.669 20.725,-1.039 21.272,-1.585 21.272,-1.731 21.595,-2.055 21.595,-2.353 v1(22.592,-3.351) ; R6.1@26.35,-5.25 26.942,-5.25 27.192,-5.5 v1(27.25,-5.5) ; P4.3@27.397,-11.562 27.397,-12.397 v1(28,-13)
  Bottom Layer w0.3: C6.1@7.395,-3.906 8.274,-3.026 8.274,-2.989 ; v1(8.274,-2.631) v1@8.418,-2.775 ; C7.1@8.334,-3.943 8.334,-3.038 8.286,-2.989 ; U1.1@8.45,-1.845 8.754,-1.845 8.754,-2.44 v1@8.418,-2.775 ; C13.1@8.521,8.683 8.552,8.714 9.238,8.714 C10.1@9.257,8.695 ; C10.1@9.46,8.696 9.691,8.928 v1(10.34,8.928) 11.171,8.928 ; U1.64@10.227,-3.062 10.154,-2.989 8.286,-2.989 ; v1@10.243,8.921 11.074,8.921 11.25,8.746 U1.19@11.25,7.455 ; 8.286,-2.989 8.286,-2.908 v1@8.418,-2.775